# Altium PCB Socket-board.PcbDoc
Units mm, origin at the board's own origin, x right, y up, seen from the top; angles counter-clockwise.
Board outline 300 x 200 mm, 2 copper layers (Top Layer, Bottom Layer); 14 components, 43 nets, 97 pads, 2 vias.
Unrouted connection lines stored in the file: 3.
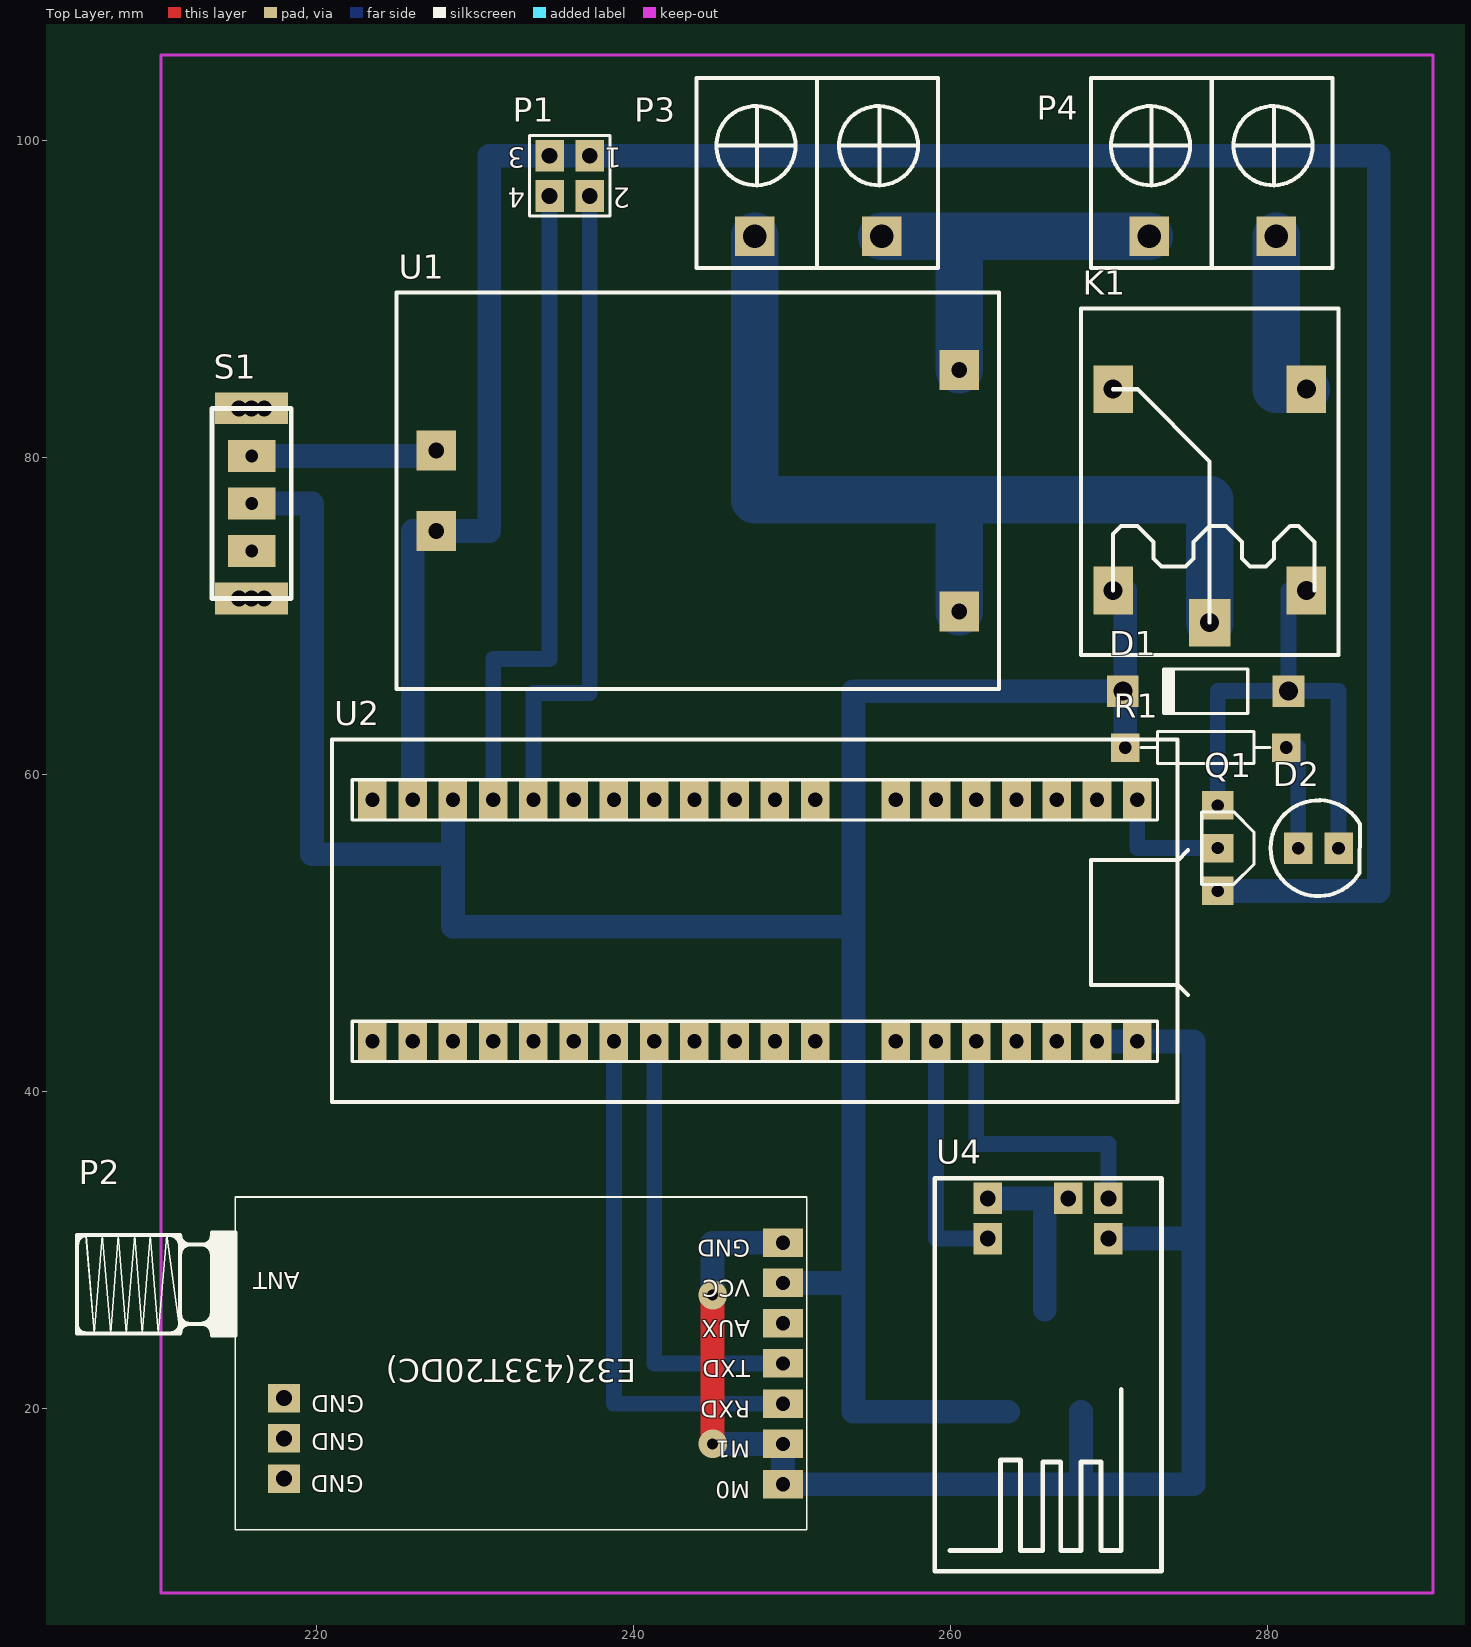
[diagram p0: Top Layer view]
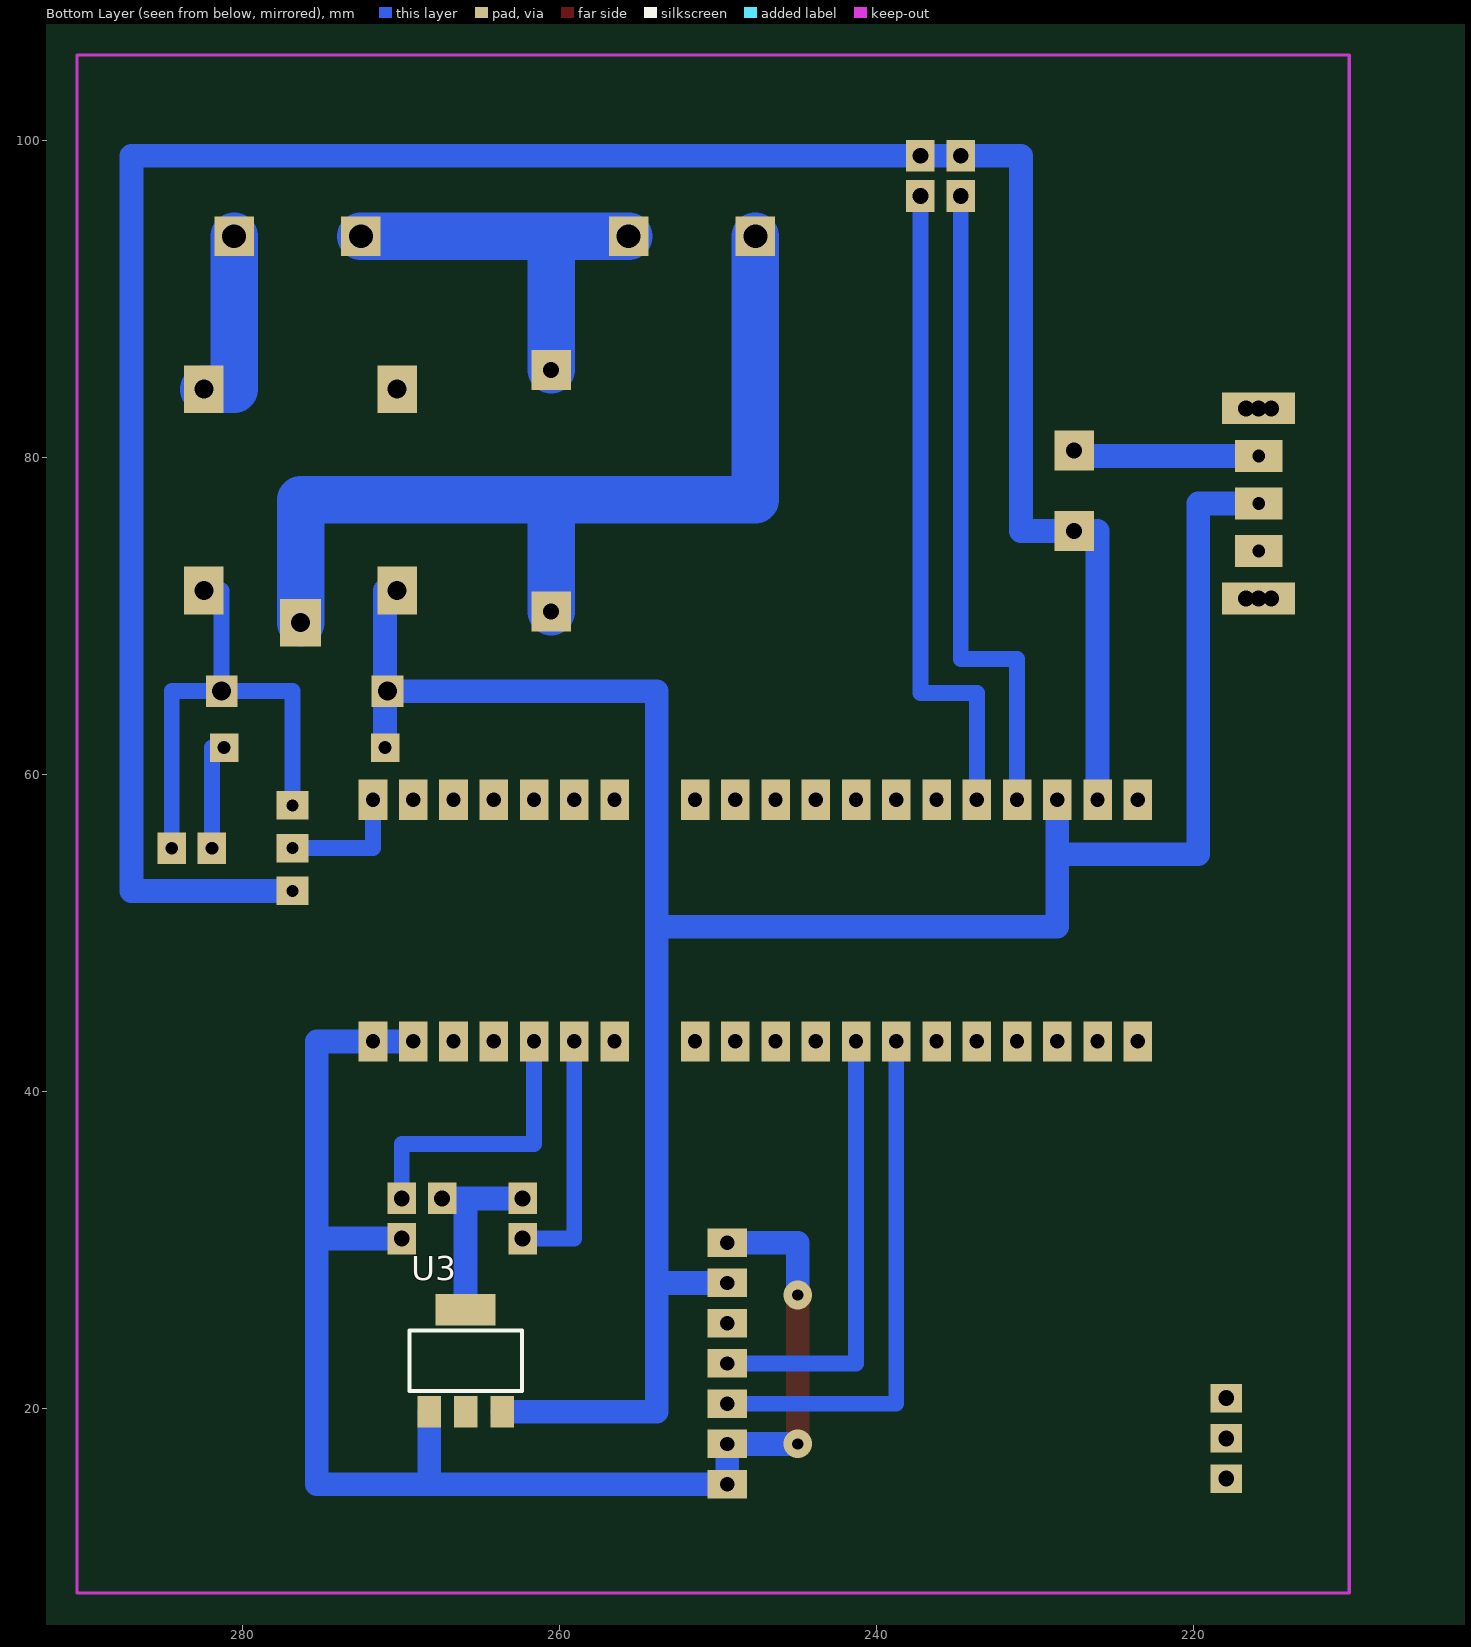
[diagram p1: Bottom Layer view, seen from below]

## Layer stack, top to bottom
Top Layer: signal copper 0.0356
Dielectric: dielectric 0.32, FR-4, Dk 4.8
Bottom Layer: signal copper 0.0356

## Board outline
0,200 300,200 300,0 0,0

## Design rules (kind name [scope] priority, off if disabled: settings)
Clearance [All] p1: gap=0.5
PolygonConnect [All] p1: connectstyle=Relief reliefconductorwidth=0.254 reliefentries=4 polygonreliefangle="90 Angle"
RoutingVias [All] p1: holewidth=0.6 width=1 viastyle="Through Hole" minholewidth=0.711 minwidth=1.27 maxholewidth=0.711 maxwidth=1.27
SilkscreenOverComponentPads [All] p1: minsilkscreentomaskgap=0.254
SolderMaskExpansion [All] p1: expansion=0.102
TestPointUsage [All] p1: valid=0 allowmultiple=FALSE
Testpoint [All] p1: side=15 testpointundercomponent=TRUE minsize=1.016 maxsize=2.54 preferedsize=1.524 minholesize=0 maxholesize=1.016 preferedholesize=0.813 testpointgrid=0.025 style=1023 order=0-112345678
Width [All] p1: maxlimit=3 minlimit=0.2 preferedwidth=0.6
23 further rules are at their usual default settings.

## Components (designator, comment, footprint, x,y, rotation, side; value= is the part's Value field where it differs from the comment)
D1 "Diode 1N4001" DO-41 276.098,65.278 r180 top
D2 "二极管--发光" LED-5 281.94,55.372 r0 top
K1 "继电器-RELAY-3" 继电器5 276.352,69.596 r270 top
P1 "Header 2X2" HDR2X2 237.236,99.06 r180 top
P2 "Header 7" PE32(433T20DC) 249.428,15.24 r180 top
P3 "AC in" KF7.62-2P 255.524,93.98 r0 top
P4 "AC out" KF7.62-2P 280.416,93.98 r0 top
Q1 "PNP" TO-92B 276.86,55.372 r270 top
R1 "Res2" AXIAL-0.4 276.098,61.722 r0 top
S1 "开关-SW-SPDT" SW3 215.9,71.12 r90 top
U1 "AC to DC" 艾尔塞VIPer12A 225.044,90.424 r180 top
U2 "Core_STM32_YX" Core_STM32_YX 223.52,43.18 r0 top
U3 "Ams1117" sot-223 268.224,19.812 r180 bottom
U4 "ESP-01" 模块ESP8266 273.304,34.544 r180 top

## Footprints (in the part's own frame and the unit in brackets; to place one, negate y for a bottom-side part, rotate by r counter-clockwise, add the part's x,y. Pads: shape width x height; smd on the part's side, far side on the other; paste and mask are expansions set on the pad)
AXIAL-0.4 [mm] "Resistor; 2 Leads"
  rect 1.8x1.8 hole 0.8: 1(-5.08,0) 2(5.08,0)
  silkscreen extent -4.06,-1.02 4.06,1.02
Core_STM32_YX [mm]
  rect 1.8x2.54 hole 0.9: 1(0,0) 2(2.54,0) 3(5.08,0) 4(7.62,0) 5(10.16,0) 6(12.7,0) 7(15.24,0) 8(17.78,0) 9(20.32,0) 10(22.86,0) 11(25.4,0) 12(27.94,0) 14(33.02,0) 15(35.56,0) 16(38.1,0) 17(40.64,0) 18(43.18,0) 19(45.72,0) 20(48.26,0) 21(48.26,15.24) 22(45.72,15.24) 23(43.18,15.24) 24(40.64,15.24) 25(38.1,15.24) 26(35.56,15.24) 27(33.02,15.24) 29(27.94,15.24) 30(25.4,15.24) 31(22.86,15.24) 32(20.32,15.24) 33(17.78,15.24) 34(15.24,15.24) 35(12.7,15.24) 36(10.16,15.24) 37(7.62,15.24) 38(5.08,15.24) 39(2.54,15.24) 40(0,15.24)
  rect 0x0 all layers, no hole: 13(30.48,0) 28(30.48,15.24)
  silkscreen extent -2.54,-3.81 51.47,19.05
DO-41 [mm] "Diode, Axial; Body 5.2 x 2.7 mm (LxDia. max), Lead Dia. 0.86 mm (max)"
  rect 2x2 hole 1.2: 1(-5.23,0) 2(5.23,0)
  silkscreen extent -2.65,-1.4 2.75,1.4
HDR2X2 [mm] "Connector; Header; 2x2 Position"
  rect 1.8x2 hole 1: 1(0,0) 2(0,2.54) 3(2.54,0) 4(2.54,2.54)
  silkscreen extent -1.27,-1.27 3.81,3.81
KF7.62-2P [mm]
  rect 2.5x2.5 hole 1.5: 1(-7.873,0) 2(0.127,0)
  silkscreen extent -11.56,-2 3.68,10
LED-5 [mm]
  rect 1.8x2 hole 0.8: 1(0,0) 2(2.54,0)
  silkscreen extent -1.75,-3.02 3.88,3.02
PE32(433T20DC) [mm] "36mm*21mm-D/SMA长度12.5mm"
  rect 2.5x1.8 hole 0.9: 1(0,0) 2(0,-2.54) 3(0,-5.08) 4(0,-7.62) 5(0,-10.16) 6(0,-12.7) 7(0,-15.24)
  rect 2x1.8 hole 1: 8(31.49,-5.43) 9(31.49,-2.89) 10(31.49,-0.35)
  silkscreen extent -1.51,-18.12 44.54,2.88
sot-223 [mil]
  rect 59x79 smd: 1(0,0) 2(90.55,0) 3(181.1,0)
  rect 150x79 smd: 2(89.88,253.54)
  silkscreen extent -49,52 231,202
SW3 [mm]
  rect 2x3 hole 1: 0(0,0.8) 0(0,0) 0(0,-0.8) 0(12,-0.8) 0(12,0) 0(12,0.8)
  rect 2x3 hole 0.8: 1(6,0) 2(3,0) 3(9,0)
  silkscreen extent 0,-2.5 12,2.5
TO-92B [mm]
  rect 1.8x2 hole 0.762: 1(-2.7,0) 2(0,0) 3(2.7,0)
  silkscreen extent -2.29,-1.02 2.29,2.29
模块ESP8266 [mm]
  rect 1.8x2 hole 1: 1(3.34,3.81) 4(10.96,3.81) 5(10.96,1.27) 7(5.88,1.27) 8(3.34,1.27)
  rect 0x0 all layers, no hole: 2(5.88,3.81) 3(8.42,3.81) 6(8.42,1.27)
  silkscreen extent 0,0 14.3,24.8
继电器5 [mm]
  rect 3x2.6 hole 1.2: 1(0,0)
  rect 3x2.5 hole 1.2: 2(-14.732,6.096) 3(-14.732,-6.096) 4(-2.032,-6.096) 5(-2.032,6.096)
  silkscreen extent -19.81,-8.13 2.03,8.13
艾尔塞VIPer12A [mm]
  rect 2.5x2.5 hole 1: 1(-35.5,20.12) 2(-35.5,4.88) 3(-2.5,9.96) 4(-2.5,15.04)
  silkscreen extent -38,0 0,25

## Part data
D1: "1 Amp General Purpose Rectifier"
P1: "Header, 2-Pin, Dual row"
P2: "Header, 7-Pin"
P3 P4: library part "Header 2", "Header, 2-Pin"
Q1: library part 三极管-PNP
R1: "Resistor"
U1: library part 艾尔塞VIPer12A
U3: library part оƬ-AMS1117
U4: library part "模块ESP8266 ESP-01"

## Via types
v1: diameter 1.8, hole 0.711, Top Layer to Bottom Layer, 2 vias

## Nets (pads, with @x,y where several pads share a name; then routed paths per layer and width w, separated by ;. In a path a pad name is that pad's centre, name@x,y a point inside that pad or via, vN(x,y) a via of type N, cw(c..) or ccw(c..) an arc to the next point about the centre after c; other vN are vias at no path point)
3V3: U2.18 U2.40
+5V: D1.2 K1.4 P2.6 R1.1 S1.1 U2.38 U3.3 | length 155.4
  Bottom Layer w1.5: S1.1 219.71,77.12 219.71,54.991 228.6,54.991 ; U2.38 228.6,54.991 ; P2.6 253.873,27.94 ; U3.3 253.873,19.812 253.873,27.94 ; K1.4 271.018,71.628 R1.1 ; D1.2 253.873,65.278 253.873,50.419 ; 228.6,54.991 228.6,50.419 253.873,50.419 ; 253.873,27.94 253.873,50.419
GND: P1.1 P1.3 P2.1 P2.2 P2.7 Q1.3 U1.4 U2.19 U2.20 U2.39 U3.1 U4.1 | length 252.2
  Top Layer w1.5: v1(244.983,17.78) v1(244.983,27.178)
  Bottom Layer w1.5: U2.39 226.06,75.384 U1.4 230.886,75.384 230.886,99.06 P1.3 P1.1 287.02,99.06 287.02,52.672 Q1.3 ; v1(244.983,17.78) P2.2 P2.1 268.224,15.24 ; v1(244.983,27.178) 244.983,30.48 P2.7 ; U3.1 268.224,15.24 ; U2.19 U2.20 275.336,43.18 275.336,30.734 ; U4.1 275.336,30.734 ; 268.224,15.24 275.336,15.24 275.336,30.734
NetD1_1: D1.1 D2.2 K1.5 Q1.1 | length 32.2
  Bottom Layer w1: Q1.1 276.86,65.278 D1.1 ; K1.5 281.328,71.628 D1.1 ; D2.2 284.48,65.278 D1.1
NetD2_1: D2.1 R1.2 | length 7.1
  Bottom Layer w1: R1.2 281.94,61.722 D2.1
NetK1_1: K1.1 P3.1 U1.1 | length 60.1
  Bottom Layer w3: P3.1 247.651,77.343 260.544,77.343 ; U1.1 260.544,77.343 ; K1.1 276.352,77.343 260.544,77.343
NetK1_2: K1.2 P4.2 | length 11.6
  Bottom Layer w3: P4.2 280.543,84.328 K1.2
NetP3_2: P3.2 P4.1 U1.2 | length 25.3
  Bottom Layer w3: P3.2 260.544,93.98 ; U1.2 260.544,93.98 ; P4.1 260.544,93.98
NetS1_3: S1.3 U1.3 | length 12
  Bottom Layer w1.5: S1.3 227.544,80.12 U1.3
NetU3_2: U3.2 U4.5 U4.7 | length 12.1
  Bottom Layer w1.5: U4.5 265.941,33.274 ; U3.2@265.941,26.252 265.941,33.274 ; U4.7 265.941,33.274
PA0: U2.5
PA1: U2.6
PA2: P2.3 U2.7 | length 33.5
  Bottom Layer w1: U2.7 238.76,20.32 P2.3
PA3: P2.4 U2.8 | length 28.4
  Bottom Layer w1: U2.8 241.3,22.86 P2.4
PA4: U2.9
PA5: U2.10
PA6: U2.11
PA7: U2.12
PA8: U2.25
PA9: U2.26
PA10: U2.27
PA11: U2.28
PA12: U2.29
PA15: U2.30
PB0: U2.13
PB1: U2.14
PB3: U2.31
PB4: U2.32
PB5: U2.33
PB6: U2.34
PB7: U2.35
PB8: P1.2 U2.36 | length 41.7
  Bottom Layer w1: U2.36 233.68,65.151 237.236,65.151 P1.2
PB9: P1.4 U2.37 | length 41.7
  Bottom Layer w1: U2.37 231.14,67.31 234.696,67.31 P1.4
PB10: U2.15 U4.4 | length 15.7
  Bottom Layer w1: U2.15 259.08,30.734 U4.4
PB11: U2.16 U4.8 | length 18.2
  Bottom Layer w1: U2.16 261.62,36.703 269.964,36.703 U4.8
PB12: Q1.2 U2.21 | length 8.1
  Bottom Layer w1: U2.21 271.78,55.372 Q1.2
PB13: U2.22
PB14: U2.23
PB15: U2.24
PC13: U2.2
PC14: U2.3
PC15: U2.4
VBAT: U2.1
pads on no net: K1.3 P2.5 P2.8 P2.9 P2.10 S1.0 S1.2 U2.17 U4.2 U4.3 U4.6

## Keep-outs
Keep-Out Layer:
  lines w0.2: 210.185,8.382 210.185,105.41 290.449,105.41 290.449,8.382 210.185,8.382

## Text inside footprints (layer, text, board x,y; h text height)
P1: Top Overlay "1" at 239.268,99.568 h1.27 r180; Top Overlay "2" at 239.776,97.028 h1.27 r180; Top Overlay "4" at 233.172,97.028 h1.27 r180; Top Overlay "3" at 233.172,99.568 h1.27 r180
P2: Top Overlay "E32(433T20DC)" at 240.157,23.622 h2.5 r180; Top Overlay "GND" at 223.012,21.209 h1.8 r180; Top Overlay "GND" at 223.012,18.796 h1.8 r180; Top Overlay "GND" at 222.981,16.161 h1.8 r180; Top Overlay "ANT" at 218.948,28.956 h1.8 r180; Top Overlay "M0" at 247.365,15.78 h1.8 r180; Top Overlay "M1" at 247.365,18.32 h1.8 r180; Top Overlay "RXD" at 247.365,20.86 h1.8 r180; Top Overlay "TXD" at 247.365,23.4 h1.8 r180; Top Overlay "AUX" at 247.365,25.94 h1.8 r180; Top Overlay "VCC" at 247.365,28.48 h1.8 r180; Top Overlay "GND" at 247.365,31.02 h1.8 r180